# Altium PCB led.PcbDoc
Units mm, origin at the board's own origin, x right, y up, seen from the top; angles counter-clockwise.
Board outline 7.62 x 4.95 mm, 2 copper layers (Top Layer, Bottom Layer); 3 components, 2 nets, 5 pads, 0 vias.
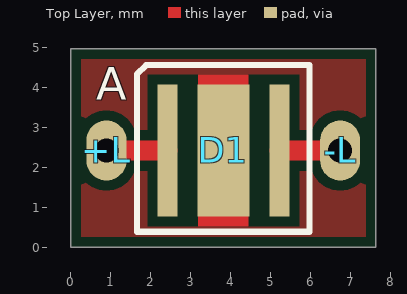
[diagram p0: Top Layer view]
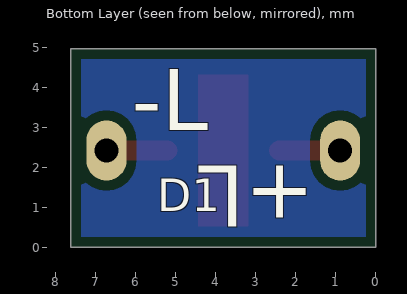
[diagram p1: Bottom Layer view, seen from below]

## Layer stack, top to bottom
Top Layer: signal copper 0.0356
Dielectric: dielectric 0.32, FR-4, Dk 4.8
Bottom Layer: signal copper 0.0356

## Board outline
0,0 0,4.953 7.62,4.953 7.62,0

## Design rules (kind name [scope] priority, off if disabled: settings)
Clearance [All] p1: gap=0.254
PasteMaskExpansion [All] p1: expansion=-0.051
PolygonConnect [All] p1: connectstyle=Relief reliefconductorwidth=0.254 reliefentries=4 polygonreliefangle="90 Angle" airgapwidth=0.254
RoutingVias [All] p1: holewidth=0.711 width=1.27 viastyle="Through Hole" minholewidth=0.711 minwidth=1.27 maxholewidth=0.711 maxwidth=1.27
SolderMaskExpansion [All] p1: expansion=0.051
Width [All] p1: maxlimit=0.508 minlimit=0.508 preferedwidth=0.508
27 further rules are at their usual default settings.

## Components (designator, comment, footprint, x,y, rotation, side; value= is the part's Value field where it differs from the comment)
+L "+LED" PIN1L 0.889,2.413 r180 top (schematic designator +LED1)
-L "-LED" PIN1L 6.731,2.413 r180 top (schematic designator -LED1)
D1 "XLampXPE2" XLAMP 2.413,2.413 r0 top

## Footprints (in the part's own frame and the unit in brackets; to place one, negate y for a bottom-side part, rotate by r counter-clockwise, add the part's x,y. Pads: shape width x height; smd on the part's side, far side on the other; paste and mask are expansions set on the pad)
PIN1L [mm] "Connector; Plug"
  oval 1x1.5 hole 0.6: 1(0,0)
XLAMP [mm]
  rect 0.5x3.3 smd: 1(0,0) 2(2.8,0)
  rect 1.3x3.3 smd: ""(1.397,0)
  silkscreen extent -0.76,-2.03 3.56,2.13

## Part data
+L -L: library part Socket, "Socket"
D1: library part LED0, "Typical INFRARED GaAs LED"

## Nets (pads, with @x,y where several pads share a name; then routed paths per layer and width w, separated by ;. In a path a pad name is that pad's centre, name@x,y a point inside that pad or via, vN(x,y) a via of type N, cw(c..) or ccw(c..) an arc to the next point about the centre after c; other vN are vias at no path point)
Net+LED1_1: +L.1 D1.1 | length 1.5
  Top Layer w0.508: +L.1 D1.1
Net-LED1_1: -L.1 D1.2 | length 1.5
  Top Layer w0.508: D1.2 -L.1
pads on no net: D1.

## Polygon pours and split planes (outlines as drawn)
no net on Top Layer "Top Layer-No Net" (solid, pour order 2): 0.254,4.699 0.254,0.254 7.366,0.254 7.366,4.699
no net on Bottom Layer "Top Layer-No Net" (solid, pour order 4): 0.254,4.699 0.254,0.254 7.366,0.254 7.366,4.699

## Other copper
Top Layer:
  rectangle: 3.175,0.508 4.445,4.318

## Text inside footprints (layer, text, board x,y; h text height)
D1: Top Overlay "A" at 0.635,3.683 h0.81